# Altium PCB led_2835_driver_circle_34X34cm.PcbDoc (part 1 of 2)
Units mm, origin at the board's own origin, x right, y up, seen from the top; angles counter-clockwise.
Board outline 340 x 340 mm, 2 copper layers (Top Layer, Bottom Layer); 127 components, 122 nets, 254 pads, 0 vias.
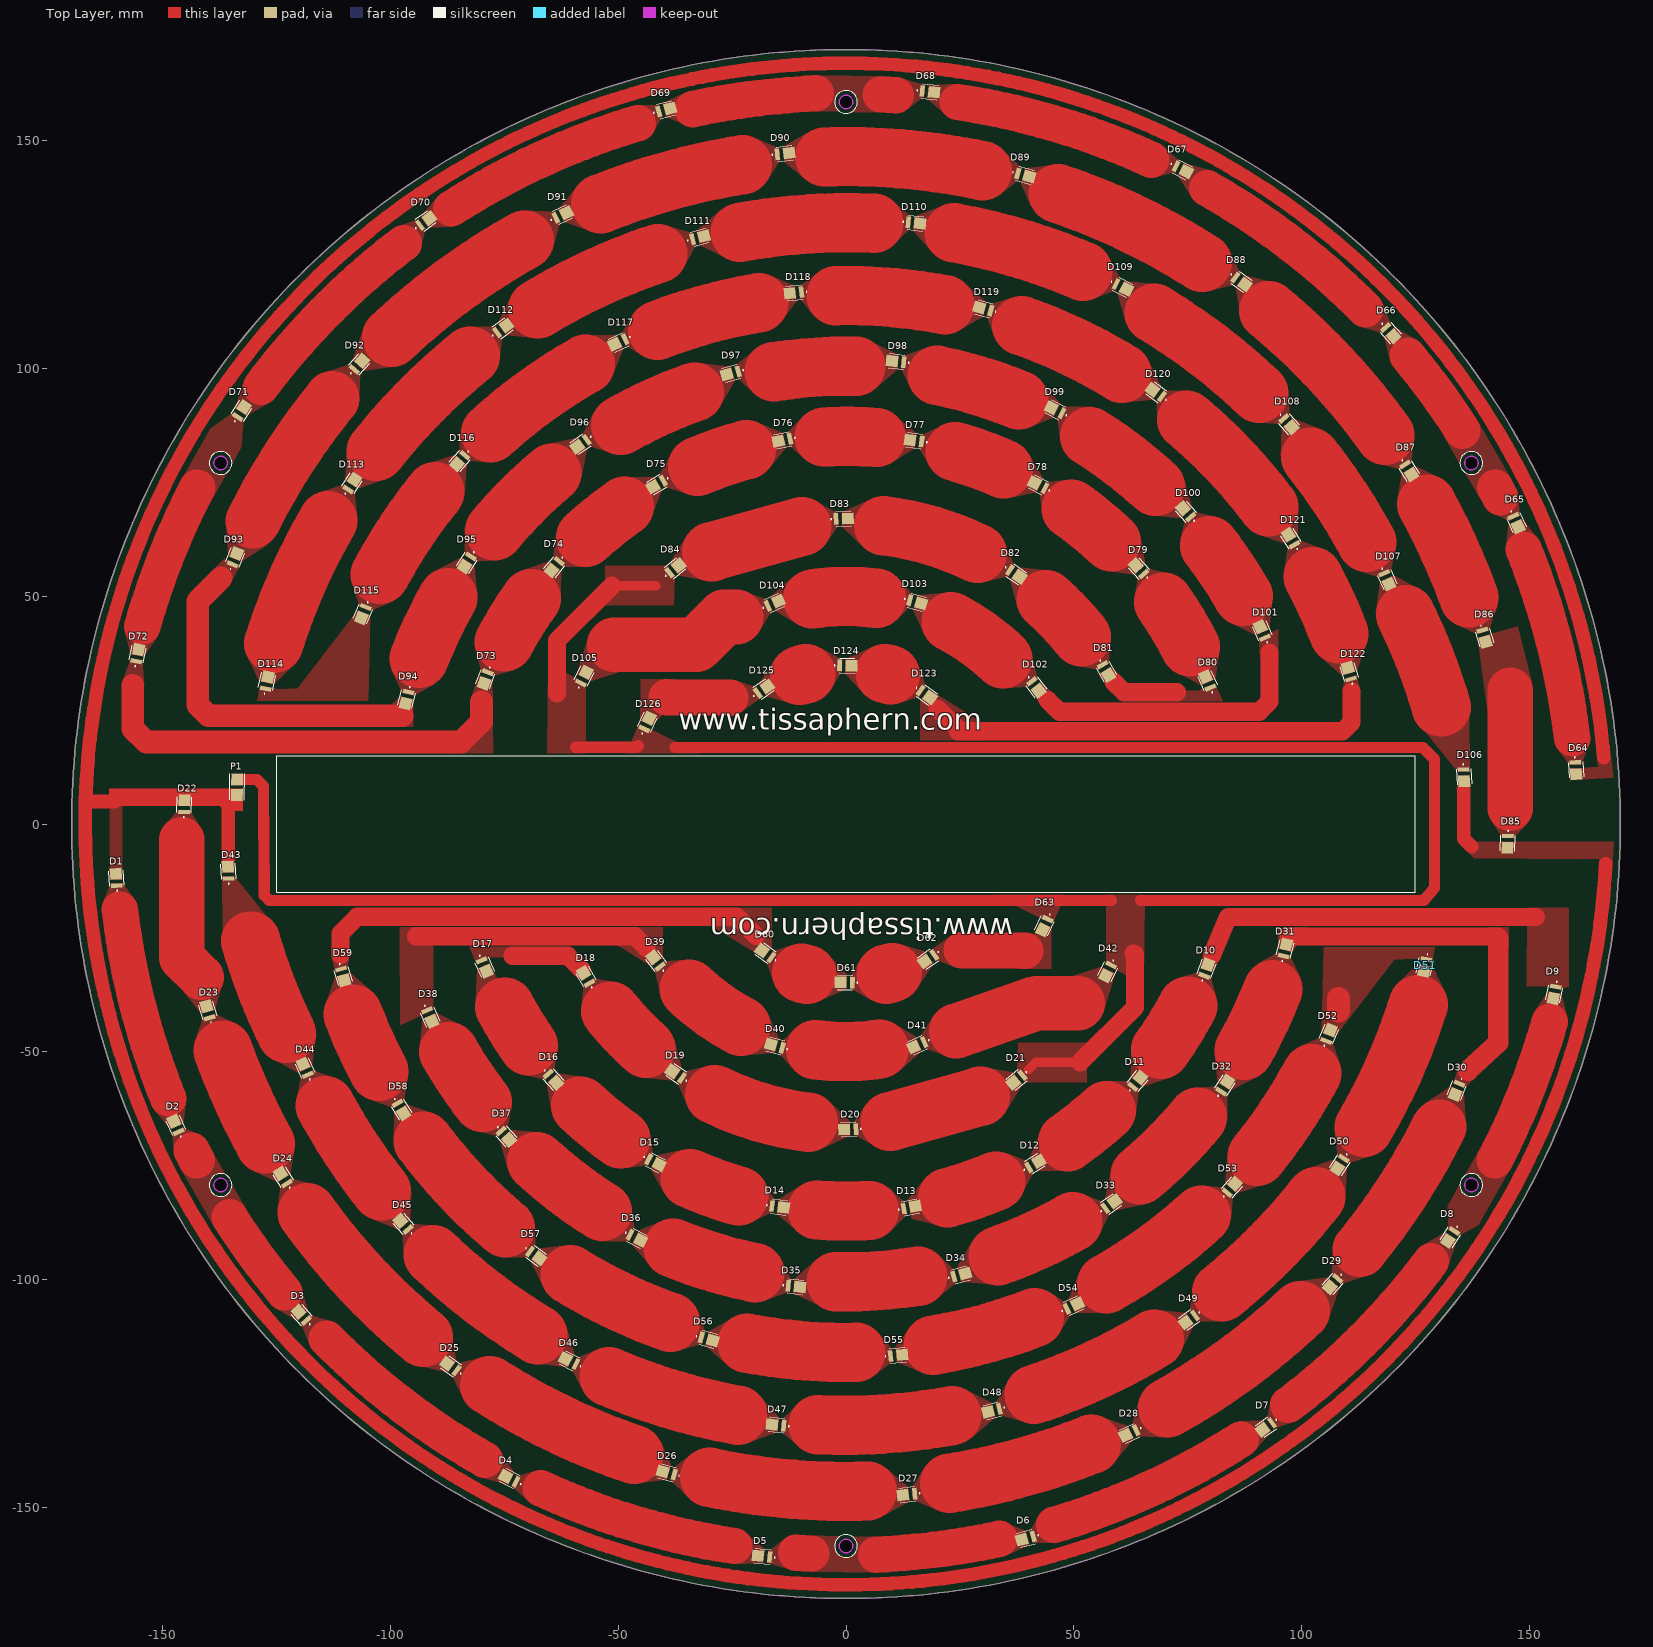
[diagram p0: Top Layer view]
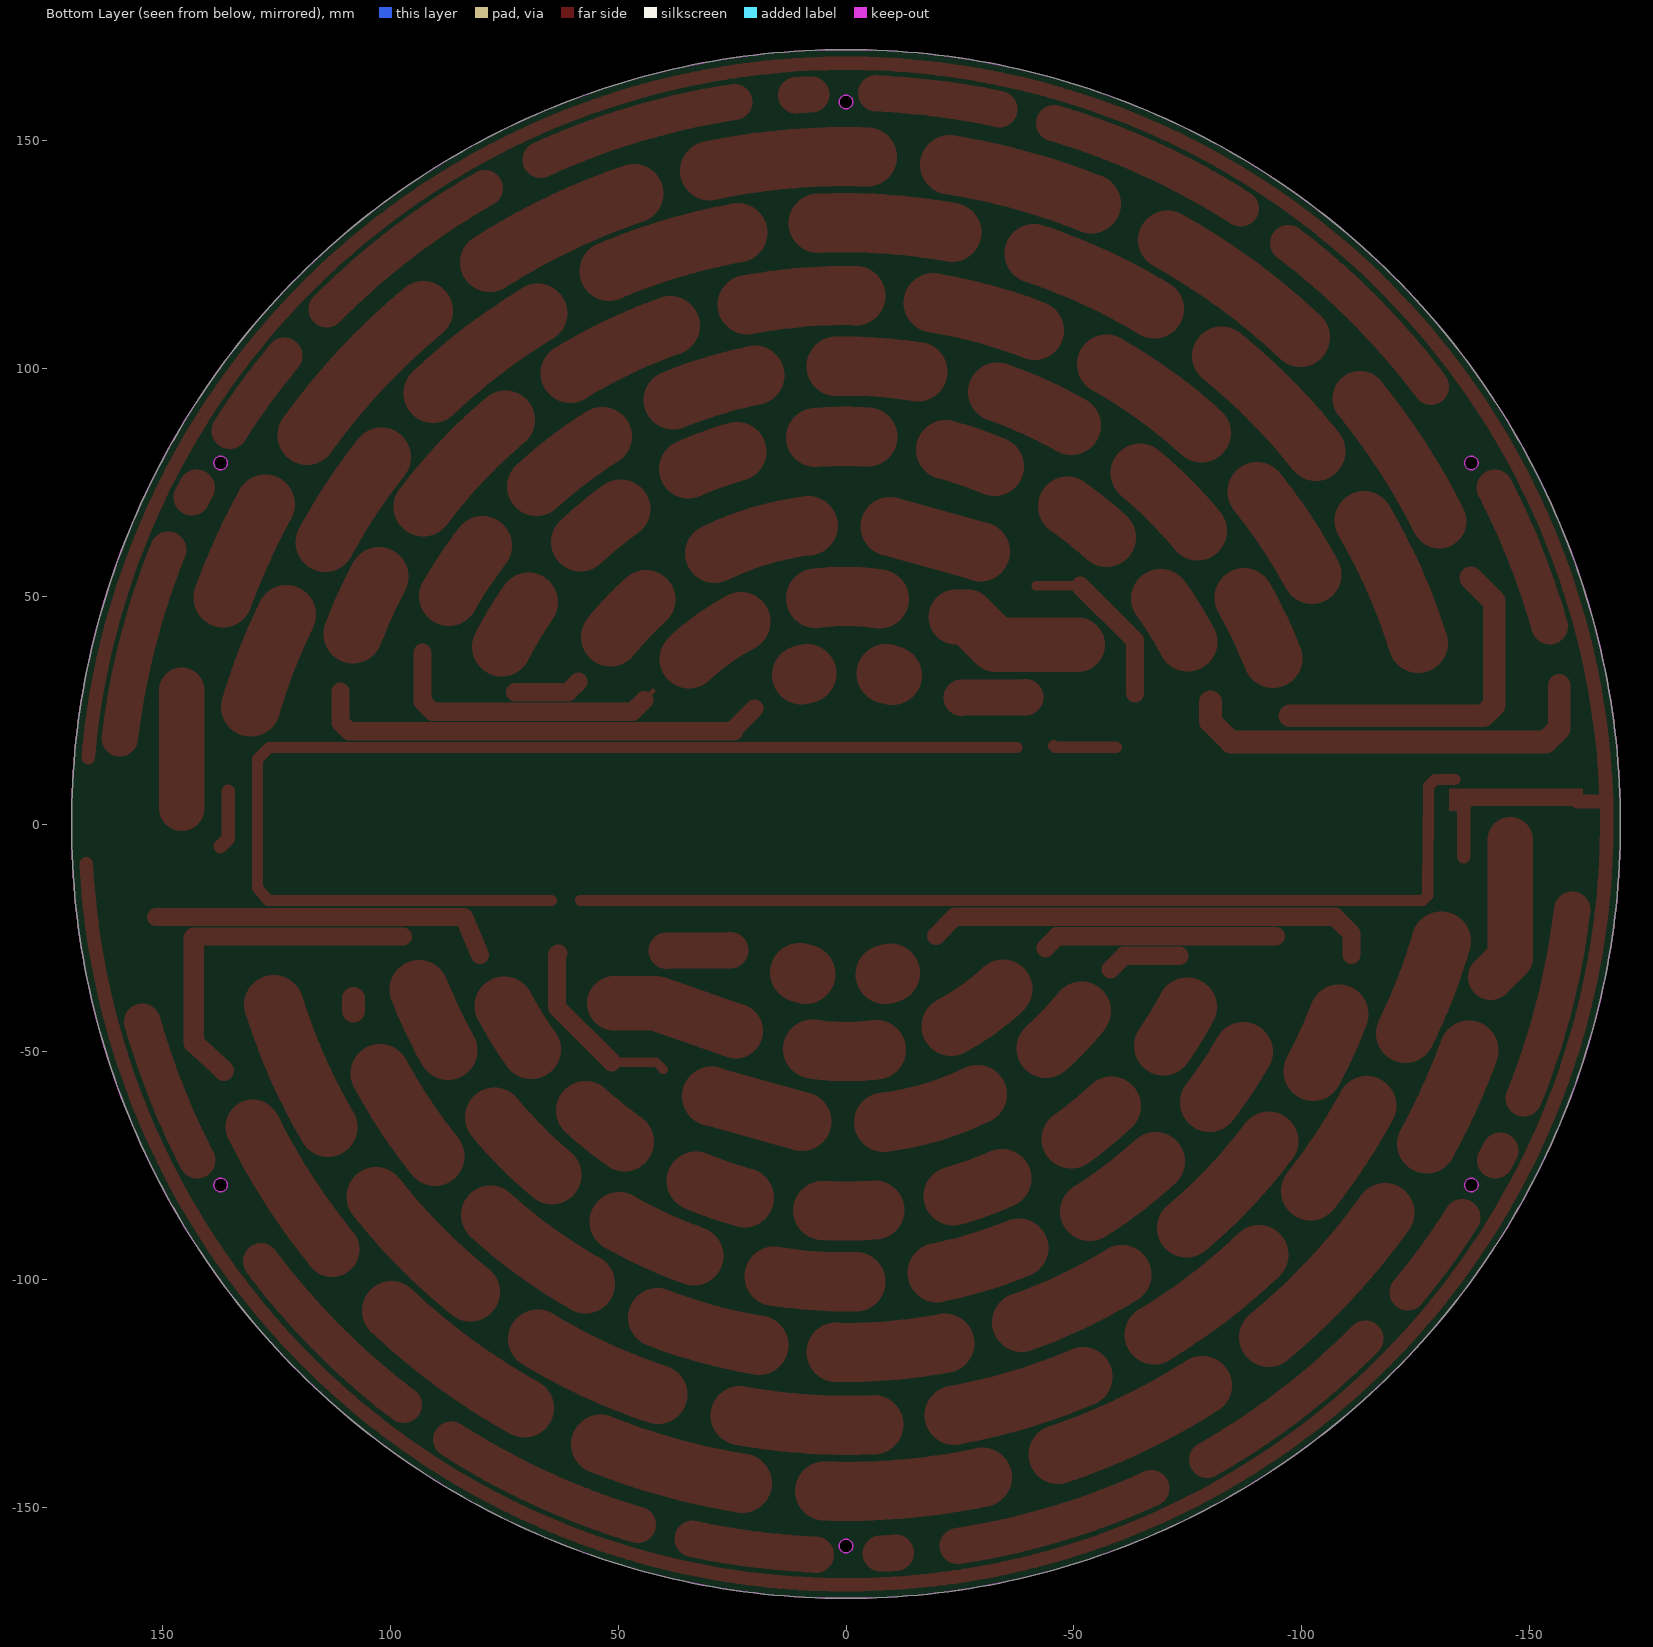
[diagram p1: Bottom Layer view, seen from below]

## Layer stack, top to bottom
Top Solder: solder mask 0.0102, Solder Resist, Dk 3.5
Top Layer: signal copper 0.0356
Dielectric 1: dielectric 0.32, FR-4, Dk 4.8
Bottom Layer: signal copper 0.0356
Bottom Solder: solder mask 0.0102, Solder Resist, Dk 3.5

## Board outline
0,-170 cw(c0,0) -170,0 cw(c0,0) 0,170 cw(c0,0) 170,0 cw(c0,0)
cut-out: 138.564,-80 cw(c137.265,-79.25) 136.515,-80.549 cw(c137.265,-79.25) 135.966,-78.5 cw(c137.265,-79.25) 138.015,-77.951 cw(c137.265,-79.25)
cut-out: -138.564,-80 cw(c-137.265,-79.25) -138.015,-77.951 cw(c-137.265,-79.25) -135.966,-78.5 cw(c-137.265,-79.25) -136.515,-80.549 cw(c-137.265,-79.25)
cut-out: 0,-160 cw(c0,-158.5) -1.5,-158.5 cw(c0,-158.5) 0,-157 cw(c0,-158.5) 1.5,-158.5 cw(c0,-158.5)
cut-out: 137.265,77.75 cw(c137.265,79.25) 135.765,79.25 cw(c137.265,79.25) 137.265,80.75 cw(c137.265,79.25) 138.765,79.25 cw(c137.265,79.25)
cut-out: -135.966,78.5 cw(c-137.265,79.25) -138.015,77.951 cw(c-137.265,79.25) -138.564,80 cw(c-137.265,79.25) -136.515,80.549 cw(c-137.265,79.25)
cut-out: 0,157 cw(c0,158.5) -1.5,158.5 cw(c0,158.5) 0,160 cw(c0,158.5) 1.5,158.5 cw(c0,158.5)

## Design rules (kind name [scope] priority, off if disabled: settings)
Clearance [All] p1: gap=0.254 ignorepadtopadclearanceinfootprint=FALSE except(0: Arc-Hole Track-Hole SMDPad-Hole THPad-Hole Via-Hole Fill-Hole Poly-Hole Region-Hole Text-Hole)
PolygonConnect PolygonConnect_4 [All vs IsNamedPolygon('NONET_L-01_P-001')] p1: connectstyle=Direct reliefconductorwidth=0.254 reliefentries=4 polygonreliefangle="90 Angle" airgapwidth=0.254
PolygonConnect PolygonConnect_3 [All vs IsNamedPolygon('NONET_L-01_P-001')] p2: connectstyle=Relief reliefconductorwidth=2 reliefentries=2 polygonreliefangle="90 Angle" airgapwidth=0.2
PolygonConnect PolygonConnect_2 [All vs IsNamedPolygon('NONET_L-01_P-001')] p3: connectstyle=Direct reliefconductorwidth=0.254 reliefentries=4 polygonreliefangle="90 Angle" airgapwidth=0.254
PolygonConnect PolygonConnect_1 [All vs IsNamedPolygon('NONET_L-01_P-001')] p4: connectstyle=Relief reliefconductorwidth=2 reliefentries=2 polygonreliefangle="90 Angle" airgapwidth=0.2
PolygonConnect [All] p5: connectstyle=Relief reliefconductorwidth=0.254 reliefentries=4 polygonreliefangle="90 Angle" airgapwidth=0.254
RoutingVias [All] p1: holewidth=0.711 width=1.27 viastyle="Through Hole" minholewidth=0.711 minwidth=1.27 maxholewidth=0.711 maxwidth=1.27
SolderMaskExpansion [All] p1: expansion=0.102 istentingtop=FALSE
Width [All] p1: maxlimit=20 minlimit=0.254 preferedwidth=0.254
30 further rules are at their usual default settings.

## Classes and differential pairs
component class led_2835_driver_circle_34X34cm: D22 D64 D65 D66 D67 D68 D69 D70 D71 D72 D73 D74 D75 D76 D77 D78 D79 D80 D81 D82 D83 D84 D86 D87 D88 D89 D90 D91 D92 D93 D94 D95 D96 D97 D98 D99 D100 D101 D102 D103 D104 D105 D106 D107 D108 D109 D110 D111 D112 D113 D114 D115 D116 D117 D118 D119 D120 D121 D122 D123 D124 D125 D126 P1

## Components (designator, comment, footprint, x,y, rotation, side; value= is the part's Value field where it differs from the comment)
D1 "OF-SMD2835Y" LED_OF-SMD2835Y -160.175,-12.225 r94 top
D2 "OF-SMD2835Y" LED_OF-SMD2835Y -147.025,-66.4 r114 top
D3 "OF-SMD2835Y" LED_OF-SMD2835Y -119.325,-108.025 r132 top
D4 "OF-SMD2835Y" LED_OF-SMD2835Y -73.575,-143.8 r153 top
D5 "OF-SMD2835Y" LED_OF-SMD2835Y -18.05,-160.775 r174 top
D6 "OF-SMD2835Y" LED_OF-SMD2835Y 39.85,-156.75 r195 top
D7 "OF-SMD2835Y" LED_OF-SMD2835Y 92.475,-132.2 r216 top
D8 "OF-SMD2835Y" LED_OF-SMD2835Y 132.825,-90.45 r237 top
D9 "OF-SMD2835Y" LED_OF-SMD2835Y 155.525,-37 r258 top
D10 "OF-SMD2835Y" LED_OF-SMD2835Y 79.05,-32.1 r70 top
D11 "OF-SMD2835Y" LED_OF-SMD2835Y 63.8,-56.65 r50.5 top
D12 "OF-SMD2835Y" LED_OF-SMD2835Y 41.225,-74.7 r31 top
D13 "OF-SMD2835Y" LED_OF-SMD2835Y 13.925,-84.175 r11.5 top
D14 "OF-SMD2835Y" LED_OF-SMD2835Y -14.975,-84 r352 top
D15 "OF-SMD2835Y" LED_OF-SMD2835Y -42.15,-74.175 r332.5 top
D16 "OF-SMD2835Y" LED_OF-SMD2835Y -64.5,-55.85 r313 top
D17 "OF-SMD2835Y" LED_OF-SMD2835Y -79.45,-31.125 r293.5 top
D18 "OF-SMD2835Y" LED_OF-SMD2835Y -56.975,-33.8 r120 top
D19 "OF-SMD2835Y" LED_OF-SMD2835Y -37.05,-55 r146 top
D20 "OF-SMD2835Y" LED_OF-SMD2835Y 0.875,-67 r182 top
D21 "OF-SMD2835Y" LED_OF-SMD2835Y 37.725,-55.975 r219 top
D22 "OF-SMD2835Y" LED_OF-SMD2835Y -145.25,3.9 r88 top
D23 "OF-SMD2835Y" LED_OF-SMD2835Y -140.05,-41.25 r106 top
D24 "OF-SMD2835Y" LED_OF-SMD2835Y -123.4,-77.8 r121.91 top
D25 "OF-SMD2835Y" LED_OF-SMD2835Y -86.525,-119.225 r144 top
D26 "OF-SMD2835Y" LED_OF-SMD2835Y -38.975,-142.475 r165 top
D27 "OF-SMD2835Y" LED_OF-SMD2835Y 13.775,-147.15 r186 top
D28 "OF-SMD2835Y" LED_OF-SMD2835Y 62.525,-133.65 r206 top
D29 "OF-SMD2835Y" LED_OF-SMD2835Y 107.075,-100.725 r228 top
D30 "OF-SMD2835Y" LED_OF-SMD2835Y 134.2,-58.2 r248 top
D31 "OF-SMD2835Y" LED_OF-SMD2835Y 96.35,-27.725 r75.96 top
D32 "OF-SMD2835Y" LED_OF-SMD2835Y 83.025,-57.625 r57 top
D33 "OF-SMD2835Y" LED_OF-SMD2835Y 57.95,-83.575 r36 top
D34 "OF-SMD2835Y" LED_OF-SMD2835Y 24.9,-99 r15 top
D35 "OF-SMD2835Y" LED_OF-SMD2835Y -11.4,-101.5 r354 top
D36 "OF-SMD2835Y" LED_OF-SMD2835Y -46.25,-90.775 r333 top
D37 "OF-SMD2835Y" LED_OF-SMD2835Y -74.825,-68.325 r312 top
D38 "OF-SMD2835Y" LED_OF-SMD2835Y -91.45,-42.1 r294 top
D39 "OF-SMD2835Y" LED_OF-SMD2835Y -41.55,-30.275 r127 top
D40 "OF-SMD2835Y" LED_OF-SMD2835Y -15.225,-48.775 r164 top
D41 "OF-SMD2835Y" LED_OF-SMD2835Y 16,-48.425 r204 top
D42 "OF-SMD2835Y" LED_OF-SMD2835Y 57.625,-32.125 r244 top
D43 "OF-SMD2835Y" LED_OF-SMD2835Y -135.625,-10.7 r93 top
D44 "OF-SMD2835Y" LED_OF-SMD2835Y -118.65,-53.875 r114 top
D45 "OF-SMD2835Y" LED_OF-SMD2835Y -96.975,-88.025 r132 top
D46 "OF-SMD2835Y" LED_OF-SMD2835Y -60.425,-117.95 r153 top
D47 "OF-SMD2835Y" LED_OF-SMD2835Y -14.95,-131.95 r174 top
D48 "OF-SMD2835Y" LED_OF-SMD2835Y 32.425,-128.7 r195 top
D49 "OF-SMD2835Y" LED_OF-SMD2835Y 75.575,-108.65 r216 top
D50 "OF-SMD2835Y" LED_OF-SMD2835Y 108.575,-74.55 r237 top
D51 "OF-SMD2835Y" LED_OF-SMD2835Y 127.15,-30.975 r258 top
D52 "OF-SMD2835Y" LED_OF-SMD2835Y 105.9,-46.425 r68 top
D53 "OF-SMD2835Y" LED_OF-SMD2835Y 84.525,-79.975 r48 top
D54 "OF-SMD2835Y" LED_OF-SMD2835Y 49.65,-105.85 r26 top
D55 "OF-SMD2835Y" LED_OF-SMD2835Y 11.05,-116.625 r6 top
D56 "OF-SMD2835Y" LED_OF-SMD2835Y -30.5,-113.025 r345 top
D57 "OF-SMD2835Y" LED_OF-SMD2835Y -68.3,-94.575 r324 top
D58 "OF-SMD2835Y" LED_OF-SMD2835Y -97.775,-62.4 r302 top
D59 "OF-SMD2835Y" LED_OF-SMD2835Y -110.5,-33.075 r286 top
D60 "OF-SMD2835Y" LED_OF-SMD2835Y -17.425,-28.525 r144 top
D61 "OF-SMD2835Y" LED_OF-SMD2835Y 0.1,-34.775 r179 top
D62 "OF-SMD2835Y" LED_OF-SMD2835Y 18.325,-29.475 r215 top
D63 "OF-SMD2835Y" LED_OF-SMD2835Y 43.725,-22.05 r245 top
D64 "OF-SMD2835Y" LED_OF-SMD2835Y 160.175,12.225 r274 top
D65 "OF-SMD2835Y" LED_OF-SMD2835Y 147.025,66.4 r294 top
D66 "OF-SMD2835Y" LED_OF-SMD2835Y 119.325,108.025 r312 top
D67 "OF-SMD2835Y" LED_OF-SMD2835Y 73.575,143.8 r333 top
D68 "OF-SMD2835Y" LED_OF-SMD2835Y 18.05,160.775 r354 top
D69 "OF-SMD2835Y" LED_OF-SMD2835Y -39.85,156.75 r15 top
D70 "OF-SMD2835Y" LED_OF-SMD2835Y -92.475,132.2 r36 top
D71 "OF-SMD2835Y" LED_OF-SMD2835Y -132.825,90.45 r57 top
D72 "OF-SMD2835Y" LED_OF-SMD2835Y -155.525,37 r78 top
D73 "OF-SMD2835Y" LED_OF-SMD2835Y -79.05,32.1 r250 top
D74 "OF-SMD2835Y" LED_OF-SMD2835Y -63.8,56.65 r230.5 top
D75 "OF-SMD2835Y" LED_OF-SMD2835Y -41.235,74.69 r210.5 top
D76 "OF-SMD2835Y" LED_OF-SMD2835Y -13.565,84.299 r191.5 top
D77 "OF-SMD2835Y" LED_OF-SMD2835Y 15.335,84.124 r172 top
D78 "OF-SMD2835Y" LED_OF-SMD2835Y 42.51,74.299 r152.5 top
D79 "OF-SMD2835Y" LED_OF-SMD2835Y 64.5,55.85 r133 top
D80 "OF-SMD2835Y" LED_OF-SMD2835Y 79.45,31.125 r113.5 top
D81 "OF-SMD2835Y" LED_OF-SMD2835Y 56.975,33.8 r300 top
D82 "OF-SMD2835Y" LED_OF-SMD2835Y 37.05,55 r326 top
D83 "OF-SMD2835Y" LED_OF-SMD2835Y -0.875,67 r2 top
D84 "OF-SMD2835Y" LED_OF-SMD2835Y -37.725,55.975 r39 top
D85 "OF-SMD2835Y" LED_OF-SMD2835Y 145.25,-3.9 r268 top
D86 "OF-SMD2835Y" LED_OF-SMD2835Y 140.05,41.25 r286 top
D87 "OF-SMD2835Y" LED_OF-SMD2835Y 123.4,77.8 r301.91 top
D88 "OF-SMD2835Y" LED_OF-SMD2835Y 86.525,119.225 r324 top
D89 "OF-SMD2835Y" LED_OF-SMD2835Y 38.975,142.475 r345 top
D90 "OF-SMD2835Y" LED_OF-SMD2835Y -13.775,147.15 r6 top
D91 "OF-SMD2835Y" LED_OF-SMD2835Y -62.525,133.65 r26 top
D92 "OF-SMD2835Y" LED_OF-SMD2835Y -107.075,100.725 r48 top
D93 "OF-SMD2835Y" LED_OF-SMD2835Y -134.2,58.2 r68 top
D94 "OF-SMD2835Y" LED_OF-SMD2835Y -96.35,27.725 r255.96 top
D95 "OF-SMD2835Y" LED_OF-SMD2835Y -83.025,57.625 r237 top
D96 "OF-SMD2835Y" LED_OF-SMD2835Y -57.95,83.575 r216 top
D97 "OF-SMD2835Y" LED_OF-SMD2835Y -24.9,99 r195 top
D98 "OF-SMD2835Y" LED_OF-SMD2835Y 11.4,101.5 r174 top
D99 "OF-SMD2835Y" LED_OF-SMD2835Y 46.25,90.775 r153 top
D100 "OF-SMD2835Y" LED_OF-SMD2835Y 74.825,68.325 r132 top
D101 "OF-SMD2835Y" LED_OF-SMD2835Y 91.45,42.1 r114 top
D102 "OF-SMD2835Y" LED_OF-SMD2835Y 41.55,30.275 r307 top
D103 "OF-SMD2835Y" LED_OF-SMD2835Y 15.225,48.775 r344 top
D104 "OF-SMD2835Y" LED_OF-SMD2835Y -16,48.425 r24 top
D105 "OF-SMD2835Y" LED_OF-SMD2835Y -57.625,32.125 r64 top
D106 "OF-SMD2835Y" LED_OF-SMD2835Y 135.625,10.7 r273 top
D107 "OF-SMD2835Y" LED_OF-SMD2835Y 118.65,53.875 r294 top
D108 "OF-SMD2835Y" LED_OF-SMD2835Y 96.975,88.025 r312 top
D109 "OF-SMD2835Y" LED_OF-SMD2835Y 60.425,117.95 r333 top
D110 "OF-SMD2835Y" LED_OF-SMD2835Y 14.95,131.95 r354 top
D111 "OF-SMD2835Y" LED_OF-SMD2835Y -32.425,128.7 r15 top
D112 "OF-SMD2835Y" LED_OF-SMD2835Y -75.575,108.65 r36 top
D113 "OF-SMD2835Y" LED_OF-SMD2835Y -108.575,74.55 r57 top
D114 "OF-SMD2835Y" LED_OF-SMD2835Y -127.15,30.975 r78 top
D115 "OF-SMD2835Y" LED_OF-SMD2835Y -105.9,46.425 r248 top
D116 "OF-SMD2835Y" LED_OF-SMD2835Y -84.525,79.975 r228 top
D117 "OF-SMD2835Y" LED_OF-SMD2835Y -49.65,105.85 r206 top
D118 "OF-SMD2835Y" LED_OF-SMD2835Y -11.05,116.625 r186 top
D119 "OF-SMD2835Y" LED_OF-SMD2835Y 30.5,113.025 r165 top
D120 "OF-SMD2835Y" LED_OF-SMD2835Y 68.3,94.575 r144 top
D121 "OF-SMD2835Y" LED_OF-SMD2835Y 97.775,62.4 r122 top
D122 "OF-SMD2835Y" LED_OF-SMD2835Y 110.5,33.075 r106 top
D123 "OF-SMD2835Y" LED_OF-SMD2835Y 17.425,28.525 r324 top
D124 "OF-SMD2835Y" LED_OF-SMD2835Y -0.1,34.775 r359 top
D125 "OF-SMD2835Y" LED_OF-SMD2835Y -18.325,29.475 r35 top
D126 "OF-SMD2835Y" LED_OF-SMD2835Y -43.725,22.05 r65 top
P1 "Header 2" HDR1X2_SMD -133.68,8.075 r89 top

## Footprints (in the part's own frame and the unit in brackets; to place one, negate y for a bottom-side part, rotate by r counter-clockwise, add the part's x,y. Pads: shape width x height; smd on the part's side, far side on the other; paste and mask are expansions set on the pad)
HDR1X2_SMD [mm] "Connector; Header; 2 Position"
  rect 2.6x2.55 smd: GND(1.7,0) VCC(-1.7,0)
  silkscreen extent -2.85,-1.6 2.95,1.6
LED_OF-SMD2835Y [mm]
  rect 2.6x2.55 smd: A(1.3,0)
  rect 1x2.55 smd: C(-1.3,0)
  silkscreen extent -2.5,-1.6 2,1.6

## Part data
D1 D2 D3 D4 D5 D6 D7 D8 D9 D10 D11 D12 D13 D14 D15 D16 D17 D18 D19 D20 D21 D22 D23 D24 D25 D26 D27 D28 D29 D30 D31 D32 D33 D34 D35 D36 D37 D38 D39 D40 D41 D42 D43 D44 D45 D46 D47 D48 D49 D50 D51 D52 D53 D54 D55 D56 D57 D58 D59 D60 D61 D62 D63 D64 D65 D66 D67 D68 D69 D70 D71 D72 D73 D74 D75 D76 D77 D78 D79 D80 D81 D82 D83 D84 D85 D86 D87 D88 D89 D90 D91 D92 D93 D94 D95 D96 D97 D98 D99 D100 D101 D102 D103 D104 D105 D106 D107 D108 D109 D110 D111 D112 D113 D114 D115 D116 D117 D118 D119 D120 D121 D122 D123 D124 D125 D126: "LED; SMD; 2835, PLCC2; yellow; 2200-2800mcd; 2.8x3.5x0.75mm; 120Â°", Package=None, Availability=Unavailable, MP=OF-SMD2835Y, Price=None
P1: "Header, 2-Pin", LatestRevisionDate=17-Jul-2002, LatestRevisionNote="Re-released for DXP Platform.", Publisher="Altium Limited"

## Nets (pads, with @x,y where several pads share a name; then routed paths per layer and width w, separated by ;. In a path a pad name is that pad's centre, name@x,y a point inside that pad or via, vN(x,y) a via of type N, cw(c..) or ccw(c..) an arc to the next point about the centre after c; other vN are vias at no path point)
GND: D21.C D42.C D63.C D84.C D105.C D126.C P1.GND | length 571.7
  Top Layer w2: -51.4,52.3 -41.675,52.3 ; 40.125,-53.85 41.675,-52.3 51.4,-52.3
  Top Layer w2.5: P1.GND@-133.65,9.775 -129.362,9.775 -127.898,8.31 -127.874,7.298 -127.669,-14.446 -127.669,-15.696 -126.567,-16.798 58.253,-16.798 ; -59.36,16.805 -45.91,16.805 -45.578,17.137 ; -37.531,16.799 126.581,16.799 129.173,14.207 129.173,-14.033 128.57,-14.735 126.798,-16.8 64.674,-16.8
  Top Layer w4: -63.438,28.663 -63.438,40.262 -51.4,52.3 ; 51.4,-52.3 63.438,-40.262 63.438,-28.663 63.175,-28.4
NetD1_C: D1.C D2.A | length 42.9
  Top Layer w8: -159.397,-18.785 ccw(c0,0) -148.78,-60.207
NetD2_C: D2.C D3.A | length 22.7
  Top Layer w8: -143.581,-71.728 ccw(c0,0) -142.523,-73.807 ; -135.279,-86.37 ccw(c0,0) -123.263,-102.794
NetD3_C: D3.C D4.A | length 43.8
  Top Layer w8: -113.952,-113.027 ccw(c0,0) -79.301,-139.541
NetD4_C: D4.C D5.A | length 44.5
  Top Layer w8: -66.978,-145.84 ccw(c-0.4,0.2) -24.483,-158.483
NetD5_C: D5.C D6.A | length 30.6
  Top Layer w8: -10.945,-159.953 ccw(c-0.4,0.2) -7.598,-160.138 ; 6.658,-160.362 ccw(c0,0) 33.652,-156.933
NetD6_C: D6.C D7.A | length 45.2
  Top Layer w8: 45.682,-153.862 ccw(c0,0) 86.636,-135.109
NetD7_C: D7.C D8.A | length 44.6
  Top Layer w8: 97.098,-127.529 ccw(c0,0.268) 128.412,-96.015
NetD8_C: D8.C D9.A | length 32.8
  Top Layer w8: 142.375,-73.824 ccw(c0,0.268) 154.446,-43.398
NetD9_C: D9.C D10.A | length 76.6
  Top Layer w4: 80.355,-28.764 83.854,-20.398 151.432,-20.398
NetD10_C: D10.C D11.A | length 11.3
  Top Layer w13: 69.083,-49.523 ccw(c0,0) 75.042,-39.922
NetD11_C: D11.C D12.A | length 11
  Top Layer w13: 48.598,-69.737 ccw(c0,0) 57.176,-62.896
NetD12_C: D12.C D13.A | length 11.3
  Top Layer w13: 22.274,-82.03 ccw(c0,0) 32.931,-78.362
NetD13_C: D13.C D14.A | length 11.5
  Top Layer w13: -6.322,-84.74 ccw(c-0.007,0.026) 5.139,-84.819
NetD14_C: D14.C D15.A | length 11.4
  Top Layer w13: -34.243,-77.797 ccw(c0,0) -23.549,-81.673
NetD15_C: D15.C D16.A | length 11.5
  Top Layer w13: -58.282,-61.873 ccw(c0,0) -49.429,-69.15
NetD16_C: D16.C D17.A | length 10
  Top Layer w13: -74.921,-40.147 ccw(c0,0) -69.699,-48.652
NetD17_C: D17.C D18.A | length 16.4
  Top Layer w4: -73.23,-28.938 -61.037,-28.938 D18.A@-58.061,-31.913
NetD18_C: D18.C D19.A | length 11.3
  Top Layer w13: -51.668,-41.067 ccw(c0,0) -43.923,-49.262
NetD19_C: D19.C D20.A | length 21.6
  Top Layer w13: -28.844,-59.364 ccw(c0,0) -8.263,-65.481
NetD20_C: D20.C D21.A | length 20.5
  Top Layer w13: 9.731,-65.279 29.424,-59.775 ccw(c25.857,-47.01) 29.516,-59.749
NetD22_C: D22.C D23.A | length 31.9
  Top Layer w10: -145.834,-3.493 -145.834,-29.329 -141.569,-33.594
NetD23_C: D23.C D24.A | length 22.6
  Top Layer w13: -136.763,-49.66 ccw(c0,0) -127.456,-70.18
NetD24_C: D24.C D25.A | length 37.5
  Top Layer w13: -118.318,-85.322 ccw(c-0.1,-0.5) -92.782,-112.662
NetD25_C: D25.C D26.A | length 35.2
  Top Layer w13: -78.181,-123.274 ccw(c-0.1,-0.5) -46.513,-138.399
NetD26_C: D26.C D27.A | length 34.9
  Top Layer w13: -29.919,-143.414 ccw(c-0.094,-1.004) 4.748,-146.423
NetD27_C: D27.C D28.A | length 32.3
  Top Layer w13: 22.783,-144.694 ccw(c-0.094,-1.004) 53.828,-136.143
NetD28_C: D28.C D29.A | length 36.3
  Top Layer w13: 70.566,-128.194 ccw(c-0.094,-1.004) 99.763,-106.828
NetD29_C: D29.C D30.A | length 32.1
  Top Layer w12: 112.81,-93.398 ccw(c0,-1.505) 130.2,-66.453
NetD30_C: D30.C D31.A | length 77.8
  Top Layer w4: 97.284,-24.7 143.2,-24.7
  Top Layer w4.5: 136.575,-54.125 143.2,-47.969 143.2,-25.107
NetD31_C: D31.C D32.A | length 14.8
  Top Layer w13: 87.36,-49.684 ccw(c0,0) 93.71,-36.315
NetD32_C: D32.C D33.A | length 17.9
  Top Layer w13: 64.55,-77.03 ccw(c0,0) 77.178,-64.373
NetD33_C: D33.C D34.A | length 18.1
  Top Layer w13: 33.36,-94.802 ccw(c0,0) 49.759,-87.317
NetD34_C: D34.C D35.A | length 18.1
  Top Layer w13: -2.217,-100.476 ccw(c0,0) 15.787,-99.252
NetD35_C: D35.C D36.A | length 18.7
  Top Layer w13: -37.915,-93.074 ccw(c0,0) -20.025,-98.485
NetD36_C: D36.C D37.A | length 18.2
  Top Layer w13: -67.914,-74.081 ccw(c0,0) -53.49,-85.082
NetD37_C: D37.C D38.A | length 13.3
  Top Layer w13: -87.192,-49.978 ccw(c0,0) -79.816,-61.071
NetD38_C: D38.C D39.A | length 51.6
  Top Layer w4: -94.315,-24.64 -46.344,-24.64 ; -46.344,-24.706 -43.8,-27.25
NetD39_C: D39.C D40.A | length 14.1
  Top Layer w13: -34.465,-36.223 ccw(c0,0) -23.023,-44.384
NetD40_C: D40.C D41.A | length 14.1
  Top Layer w13: -6.684,-49.534 ccw(c-0.092,0.029) 7.37,-49.411
NetD41_C: D41.C D42.A | length 27.7
  Top Layer w12: 24.222,-45.437 cw(c28.154,-56.774) 24.229,-45.434 41.887,-39.311 43.937,-39.311 50.851,-39.343
NetD43_C: D43.C D44.A | length 21.8
  Top Layer w13: -130.673,-25.707 ccw(c-5.961,10.995) -122.796,-46.01
NetD44_C: D44.C D45.A | length 22.5
  Top Layer w13: -114.327,-61.826 ccw(c-0.079,0.201) -101.951,-80.558
NetD45_C: D45.C D46.A | length 29
  Top Layer w13: -90.648,-94.542 ccw(c-0.14,0.164) -67.657,-112.096
NetD46_C: D46.C D47.A | length 29.5
  Top Layer w13: -52.001,-121.32 ccw(c-0.593,-0.828) -23.764,-129.763
NetD47_C: D47.C D48.A | length 29.5
  Top Layer w13: -6.078,-131.857 ccw(c-0.257,-0.986) 23.26,-129.858
NetD48_C: D48.C D49.A | length 29.1
  Top Layer w13: 41.277,-125.232 ccw(c-0.026,-0.914) 67.684,-113.058
NetD49_C: D49.C D50.A | length 29.4
  Top Layer w13: 82.477,-102.706 ccw(c0.303,-0.684) 103.144,-81.831
NetD50_C: D50.C D51.A | length 29.5
  Top Layer w13: 113.705,-66.586 ccw(c0.58,-0.528) 125.591,-39.686
NetD51_C: D51.C D52.A | length 2.8
  Top Layer w5: 108.1,-41.076 108.1,-38.325
NetD52_C: D52.C D53.A | length 21.8
  Top Layer w13: 90.205,-72.932 ccw(c0,0) 102.265,-54.752
NetD53_C: D53.C D54.A | length 25.8
  Top Layer w13: 57.188,-100.923 ccw(c0,0) 78.052,-85.813
NetD54_C: D54.C D55.A | length 23.1
  Top Layer w13: 19.158,-114.407 ccw(c0,0) 41.406,-108.359
NetD55_C: D55.C D56.A | length 24
  Top Layer w13: -21.671,-113.958 ccw(c0,0) 2.17,-115.98
NetD56_C: D56.C D57.A | length 24.3
  Top Layer w13: -60.538,-98.95 ccw(c0,0) -38.591,-109.392
NetD57_C: D57.C D58.A | length 26.3
  Top Layer w13: -92.788,-69.616 ccw(c0,0) -74.769,-88.689
NetD58_C: D58.C D59.A | length 13.8
  Top Layer w13: -108.218,-41.772 ccw(c0,0) -102.513,-54.288
NetD59_C: D59.C D60.A | length 99.2
  Top Layer w4: -110.958,-28.725 -110.958,-24.008 -107.263,-20.313 ; -107.263,-20.344 -23.942,-20.344 -19.73,-24.556
NetD60_C: D60.C D61.A | length 1.2
  Top Layer w13: -9.746,-32.73 ccw(c0,0) -8.546,-33.063
NetD61_C: D61.C D62.A | length 1.4
  Top Layer w13: 8.826,-32.99 ccw(c0,0) 10.176,-32.599
NetD62_C: D62.C D63.A | length 13.9
  Top Layer w8: 25.453,-27.725 39.375,-27.825
NetD64_C: D64.C D65.A | length 42.9
  Top Layer w8: 148.78,60.207 cw(c0,0) 159.397,18.785
NetD65_C: D65.C D66.A | length 22.7
  Top Layer w8: 123.263,102.794 cw(c0,0) 135.279,86.37 ; 142.523,73.807 cw(c0,0) 143.581,71.728
NetD66_C: D66.C D67.A | length 43.8
  Top Layer w8: 79.301,139.541 cw(c0,0) 113.952,113.027
NetD67_C: D67.C D68.A | length 44.5
  Top Layer w8: 24.483,158.483 cw(c0.4,-0.2) 66.978,145.84
NetD68_C: D68.C D69.A | length 30.6
  Top Layer w8: -33.652,156.933 cw(c0,0) -6.658,160.362 ; 7.598,160.138 cw(c0.4,-0.2) 10.945,159.953
NetD69_C: D69.C D70.A | length 45.2
  Top Layer w8: -86.636,135.109 cw(c0,0) -45.682,153.862
NetD70_C: D70.C D71.A | length 44.6
  Top Layer w8: -128.412,96.015 cw(c0,-0.268) -97.098,127.529
NetD71_C: D71.C D72.A | length 32.8
  Top Layer w8: -154.446,43.398 cw(c0,-0.268) -142.375,73.824
NetD72_C: D72.C D73.A | length 93.4
  Top Layer w5: -156.55,30.425 -156.55,20.929 -153.621,18 -84.5,18 -80,22.5 -80,26.825
NetD73_C: D73.C D74.A | length 11.3
  Top Layer w13: -75.042,39.922 cw(c0,0) -69.083,49.523
NetD74_C: D74.C D75.A | length 11
  Top Layer w13: -57.176,62.896 cw(c0,0) -48.598,69.737
NetD75_C: D75.C D76.A | length 11.3
  Top Layer w13: -32.572,78.486 cw(c0.36,0.124) -21.914,82.154
NetD76_C: D76.C D77.A | length 11.5
  Top Layer w13: -4.779,84.943 cw(c0.367,0.099) 6.682,84.864
NetD77_C: D77.C D78.A | length 11.4
  Top Layer w13: 23.908,81.797 cw(c0.36,0.124) 34.603,77.921
NetD78_C: D78.C D79.A | length 11.5
  Top Layer w13: 49.429,69.15 cw(c0,0) 58.282,61.873
NetD79_C: D79.C D80.A | length 11.4
  Top Layer w13: 69.699,48.652 cw(c0,0) 75.571,38.91
NetD80_C: D80.C D81.A | length 14.8
  Top Layer w4: 58.748,31.227 61.037,28.938 72.617,28.938
NetD81_C: D81.C D82.A | length 11.3
  Top Layer w13: 43.923,49.262 cw(c0,0) 51.668,41.067
NetD82_C: D82.C D83.A | length 21.6
  Top Layer w13: 8.263,65.481 cw(c0,0) 28.844,59.364
NetD83_C: D83.C D84.A | length 20.5
  Top Layer w13: -29.516,59.749 cw(c-25.857,47.01) -29.424,59.775 -9.731,65.279
NetD85_C: D85.C D86.A | length 25.8
  Top Layer w10: 145.834,3.493 145.834,29.329
NetD86_C: D86.C D87.A | length 22.6
  Top Layer w13: 127.456,70.18 cw(c0,0) 136.763,49.66
NetD87_C: D87.C D88.A | length 37.5
  Top Layer w13: 92.782,112.662 cw(c0.1,0.5) 118.318,85.322
NetD88_C: D88.C D89.A | length 35.2
  Top Layer w13: 46.513,138.399 cw(c0.1,0.5) 78.181,123.274
NetD89_C: D89.C D90.A | length 34.9
  Top Layer w13: -4.748,146.423 cw(c0.094,1.004) 29.919,143.414
NetD90_C: D90.C D91.A | length 32.3
  Top Layer w13: -53.828,136.143 cw(c0.094,1.004) -22.783,144.694
NetD91_C: D91.C D92.A | length 36.3
  Top Layer w13: -99.763,106.828 cw(c0.094,1.004) -70.566,128.194
NetD92_C: D92.C D93.A | length 32.1
  Top Layer w12: -130.2,66.453 cw(c0,1.505) -112.81,93.398
NetD93_C: D93.C D94.A | length 75.8
  Top Layer w5: -137.122,54.047 -142.275,48.894 -142.275,26.118 -139.932,23.775 -97.475,23.775
NetD94_C: D94.C D95.A | length 14.8
  Top Layer w13: -93.71,36.315 cw(c0,0) -87.36,49.684
NetD95_C: D95.C D96.A | length 17.9
  Top Layer w13: -77.178,64.373 cw(c0,0) -64.55,77.03
NetD96_C: D96.C D97.A | length 17.8
  Top Layer w13: -49.466,87.484 cw(c0,0) -33.269,94.834
NetD97_C: D97.C D98.A | length 18.1
  Top Layer w13: -15.787,99.252 cw(c0,0) 2.217,100.476
NetD98_C: D98.C D99.A | length 18.7
  Top Layer w13: 20.025,98.485 cw(c0,0) 37.915,93.074
NetD99_C: D99.C D100.A | length 18.2
  Top Layer w13: 53.49,85.082 cw(c0,0) 67.914,74.081
NetD100_C: D100.C D101.A | length 13.3
  Top Layer w13: 79.816,61.071 cw(c0,0) 87.192,49.978
NetD101_C: D101.C D102.A | length 64.3
  Top Layer w1: D102.A@42.332,29.237 44.278,27.291 44.278,27.198
  Top Layer w4: 44.278,27.198 46.852,24.645 90.744,24.645 92.969,26.87 92.969,37.676
NetD102_C: D102.C D103.A | length 14.1
  Top Layer w13: 23.023,44.384 cw(c0,0) 34.465,36.223
NetD103_C: D103.C D104.A | length 14.1
  Top Layer w13: -7.37,49.411 cw(c0.092,-0.029) 6.684,49.534
NetD104_C: D104.C D105.A | length 29.3
  Top Layer w12: -50.851,39.343 -43.937,39.311 -32.864,39.311 -26.725,45.45 -24.075,45.45
NetD106_C: D106.C D107.A | length 21.8
  Top Layer w13: 122.796,46.01 cw(c5.961,-10.995) 130.673,25.707
NetD107_C: D107.C D108.A | length 22.5
  Top Layer w13: 101.951,80.558 cw(c0.079,-0.201) 114.327,61.826
NetD108_C: D108.C D109.A | length 29
  Top Layer w13: 67.657,112.096 cw(c0.14,-0.164) 90.648,94.542
NetD109_C: D109.C D110.A | length 29.5
  Top Layer w13: 23.764,129.763 cw(c0.593,0.828) 52.001,121.32
NetD110_C: D110.C D111.A | length 29.5
  Top Layer w13: -23.26,129.858 cw(c0.257,0.986) 6.078,131.857
NetD111_C: D111.C D112.A | length 29.1
  Top Layer w13: -67.684,113.058 cw(c0.026,0.914) -41.277,125.232
NetD112_C: D112.C D113.A | length 29.4
  Top Layer w13: -103.144,81.831 cw(c-0.303,0.684) -82.477,102.706
NetD113_C: D113.C D114.A | length 29.5
  Top Layer w13: -125.591,39.686 cw(c-0.58,0.528) -113.705,66.586
NetD114_C: D114.C D115.A
NetD115_C: D115.C D116.A | length 21.8
  Top Layer w13: -102.265,54.752 cw(c0,0) -90.205,72.932
NetD116_C: D116.C D117.A | length 25.8
  Top Layer w13: -78.052,85.813 cw(c0,0) -57.188,100.923
NetD117_C: D117.C D118.A | length 23.1
  Top Layer w13: -41.406,108.359 cw(c0,0) -19.158,114.407
NetD118_C: D118.C D119.A | length 24
  Top Layer w13: -2.17,115.98 cw(c0,0) 21.671,113.958
NetD119_C: D119.C D120.A | length 24.3
  Top Layer w13: 38.591,109.392 cw(c0,0) 60.538,98.95
NetD120_C: D120.C D121.A | length 26.3
  Top Layer w13: 74.769,88.689 cw(c0,0) 92.788,69.616
NetD121_C: D121.C D122.A | length 13.8
  Top Layer w13: 102.513,54.288 cw(c0,0) 108.218,41.772
NetD122_C: D122.C D123.A | length 100.3
  Top Layer w4: 20.075,25.375 20.645,24.805 24.556,20.894 ; 24.556,20.347 108.99,20.347 110.962,22.32 110.962,29.075
NetD123_C: D123.C D124.A | length 1.2
  Top Layer w13: 8.546,33.063 cw(c0,0) 9.746,32.73
NetD124_C: D124.C D125.A | length 1.4
  Top Layer w13: -10.176,32.599 cw(c0,0) -8.826,32.99
NetD125_C: D125.C D126.A | length 13.9
  Top Layer w8: -39.375,27.825 -25.453,27.725
VCC: D1.A D22.A D43.A D64.A D85.A D106.A P1.VCC | length 1082.3
  Top Layer w2: -160.2,6.5 -133.834,6.5 P1.VCC@-133.71,6.375
  Top Layer w3: -160.5,4.925 -166.922,4.925 -166.922,5.12 ; -135.575,-7.155 -135.575,3.168 ; 135.575,7.155 135.575,-3.168 137.332,-4.925 ; 166.365,14.555 ccw(c0,0) -166.922,5.12 ; 166.771,-8.74 cw(c0,0) -166.922,5.12

## Polygon pours and split planes (outlines as drawn)
NetD16_C on Top Layer "NONET_L-01_P-001" (solid, remove dead copper, pour order 156): -80.951,-31.774 -81.38,-40.851 -75.618,-35.928 -78.278,-30.617
NetD32_C on Top Layer "NONET_L-01_P-001" (solid, remove dead copper, pour order 310): 81.519,-57.601 83.658,-58.989 83.65,-64.95 77.15,-57.875
NetD37_C on Top Layer "NONET_L-01_P-001" (solid, remove dead copper, pour order 160): -89.918,-41.425 -92.909,-42.747 -93.575,-48.875 -84.65,-44.025
NetD58_C on Top Layer "NONET_L-01_P-001" (solid, remove dead copper, pour order 325): -97.112,-61.042 -99.284,-62.398 -104.8,-60.325 -96.075,-55.15
NetD56_C on Top Layer "NONET_L-01_P-001" (solid, remove dead copper, pour order 149): -67.278,-93.175 -69.218,-95.859 -66.375,-101.775 -60.975,-92.5
NetD53_C on Top Layer "NONET_L-01_P-001" (solid, remove dead copper, pour order 142): 83.048,-79.724 84.932,-81.423 84.525,-86.35 78.5,-79.375
VCC on Top Layer "NONET_L-01_P-001" (solid, remove dead copper, pour order 331): -136.907,-10.767 -134.273,-10.627 -134.1,-7.325 -137.075,-7.225
NetD24_C on Top Layer "NONET_L-01_P-001" (solid, remove dead copper, pour order 106): -85.512,-117.835 -87.422,-120.451 -95.525,-118.525 -86.975,-109.825
NetD30_C on Top Layer "NONET_L-01_P-001" (solid, remove dead copper, pour order 488): 133.317,-56.981 135.681,-57.936 138.2,-55.7 134.475,-53.325
VCC on Top Layer "NONET_L-01_P-001" (solid, remove dead copper, pour order 475): 161.075,-7.7 161.075,-3.88 137.875,-3.88 137.875,-7.499
NetD2_C on Top Layer "NONET_L-01_P-001" (solid, remove dead copper, pour order 68): -146.275,-75.275 -138.272,-89.124 -131.45,-85.05 -139.222,-71.674
NetD8_C on Top Layer "NONET_L-01_P-001" (solid, remove dead copper, pour order 92): 132.078,-83.853 140.85,-68.25 148,-71.675 138.804,-88.104
NetD5_C on Top Layer "NONET_L-01_P-001" (solid, remove dead copper, pour order 84): -8.375,-156.175 6.806,-156.44 6.806,-164.325 -8.175,-164.1
NetD17_C on Top Layer "NONET_L-01_P-001" (solid, remove dead copper, pour order 515): -78.039,-29.276 -74.851,-29.26 -74.856,-27.573 -78.033,-27.562
NetD17_C on Top Layer "NONET_L-01_P-001" (solid, remove dead copper, pour order 512): -81.058,-30.623 -79.099,-29.774 -72.745,-26.946 -82.693,-26.946
NetD38_C on Top Layer "NONET_L-01_P-001" (solid, remove dead copper, pour order 52): -42.752,-31.171 -49.175,-27.2 -51.8,-25.825 -51.8,-22.648 -40.225,-22.648 -40.225,-29.266
NetD30_C on Top Layer "NONET_L-01_P-001" (solid, remove dead copper, pour order 511): 140.993,-22.711 145.449,-22.711 145.449,-27.242 140.993,-27.242
NetD51_C on Top Layer "NONET_L-01_P-001" (solid, remove dead copper, pour order 62): 107.218,-46.953 122.457,-27 104.903,-27 104.438,-45.824
NetD9_C on Top Layer "NONET_L-01_P-001" (solid, remove dead copper, pour order 492): 77.825,-31.653 80.32,-32.567 82.246,-29.415 78.464,-28.114
NetD30_C on Top Layer "NONET_L-01_P-001" (solid, remove dead copper, pour order 490): 94.9,-27.365 94.9,-22.719 101.205,-22.719 97.909,-28.111
NetD9_C on Top Layer "NONET_L-01_P-001" (solid, remove dead copper, pour order 487): 158.621,-35.7 157.025,-36.2 154.525,-35.675 154.525,-32.325 158.625,-32.325
NetD9_C on Top Layer "NONET_L-01_P-001" (solid, remove dead copper, pour order 485): 149.506,-18.412 158.648,-18.412 158.621,-35.7 149.451,-35.649
NetD9_C on Top Layer "NONET_L-01_P-001" (solid, remove dead copper, pour order 484): 154.525,-35.675 157.025,-36.2 158.625,-32.9 154.725,-32.9
NetD31_C on Top Layer "NONET_L-01_P-001" (solid, remove dead copper, pour order 181): 94.919,-28.196 97.388,-28.809 99.775,-33.975 90.425,-30.725
GND on Top Layer "NONET_L-01_P-001" (solid, remove dead copper, pour order 326): 56.78,-30.82 57.075,-30.253 57.075,-15.556 65.55,-15.556 65.55,-16.175 65.321,-35.117
VCC on Top Layer "NONET_L-01_P-001" (solid, remove dead copper, pour order 482): 159.9,-3.874 168.533,-3.862 168.325,-7.7 159.9,-7.675
VCC on Top Layer "NONET_L-01_P-001" (solid, remove dead copper, pour order 476): 137.875,-7.5 134.4,-4.025 140.25,-4.025 140.275,-4
NetD85_C on Top Layer "NONET_L-01_P-001" (solid, remove dead copper, pour order 472): 146.584,-3.147 149.375,0 141.6,0.9 144.002,-3.056
VCC on Top Layer "NONET_L-01_P-001" (solid, remove dead copper, pour order 340): 165.1,-11.225 165.552,-3.888 168.527,-3.963 168.125,-11.35
NetD1_C on Top Layer "NONET_L-01_P-001" (solid, remove dead copper, pour order 338): -158.848,-12.935 -161.416,-13.111 -162.9,-16.85 -156.425,-16.15
VCC on Top Layer "NONET_L-01_P-001" (solid, remove dead copper, pour order 336): -161.625,-8.9 -161.625,7.5 -158.825,7.5 -158.825,-8.9
VCC on Top Layer "NONET_L-01_P-001" (solid, remove dead copper, pour order 335): -158.827,-12.125 -158.827,-8.676 -161.625,-8.676 -161.625,-12.325
NetD43_C on Top Layer "NONET_L-01_P-001" (solid, remove dead copper, pour order 329): -136.876,-11.56 -134.306,-11.433 -126.925,-20.525 -136.825,-23.675
GND on Top Layer "NONET_L-01_P-001" (solid, remove dead copper, pour order 327): 45.271,-21.878 32.272,-15.575 48.15,-15.575
NetD58_C on Top Layer "NONET_L-01_P-001" (solid, remove dead copper, pour order 153): -108.859,-32.616 -112.077,-33.522 -114.125,-39.325 -103.825,-37.075
GND on Top Layer "NONET_L-01_P-001" (solid, remove dead copper, pour order 321): 57.025,-30.575 65.351,-34.652 65.4,-26.496 59.6,-24.2
GND on Top Layer "NONET_L-01_P-001" (solid, remove dead copper, pour order 320): 37.551,-54.484 39.304,-56.673 52.828,-56.822 52.922,-47.974 37.823,-48.06
NetD41_C on Top Layer "NONET_L-01_P-001" (solid, remove dead copper, pour order 319): 56.048,-31.362 59.062,-32.809 56.5,-41.3 49.925,-33.35
NetD13_C on Top Layer "NONET_L-01_P-001" (solid, remove dead copper, pour order 318): 12.886,-83.083 13.406,-85.666 9.65,-89.475 9.125,-79.675
NetD12_C on Top Layer "NONET_L-01_P-001" (solid, remove dead copper, pour order 317): 13.589,-82.489 14.428,-86.677 21.475,-88.45 17.55,-77.6
NetD34_C on Top Layer "NONET_L-01_P-001" (solid, remove dead copper, pour order 316): 23.8,-97.972 24.454,-100.437 20.2,-103.85 19.8,-94.125
NetD33_C on Top Layer "NONET_L-01_P-001" (solid, remove dead copper, pour order 315): 24.43,-97.178 27.6,-91.85 33.725,-101.25 25.285,-100.472
NetD33_C on Top Layer "NONET_L-01_P-001" (solid, remove dead copper, pour order 314): 56.558,-83.021 52.075,-81.25 55.425,-90.525 58.049,-85.076
NetD32_C on Top Layer "NONET_L-01_P-001" (solid, remove dead copper, pour order 313): 56.92,-82.15 58.575,-74.5 65.575,-83.425 58.876,-84.844
NetD11_C on Top Layer "NONET_L-01_P-001" (solid, remove dead copper, pour order 312): 40.381,-73.288 42.175,-68.725 48.175,-76.075 42.059,-76.075
NetD12_C on Top Layer "NONET_L-01_P-001" (solid, remove dead copper, pour order 311): 39.88,-74.021 35.3,-72.325 38,-82.425 41.195,-76.205
NetD11_C on Top Layer "NONET_L-01_P-001" (solid, remove dead copper, pour order 309): 62.309,-56.459 64.273,-58.078 63.575,-63.925 57.275,-56.4
NetD10_C on Top Layer "NONET_L-01_P-001" (solid, remove dead copper, pour order 186): 62.469,-55.552 62.675,-48.425 71.725,-55.45 65.118,-57.729
NetD13_C on Top Layer "NONET_L-01_P-001" (solid, remove dead copper, pour order 185): -14.744,-82.352 -9.825,-79.275 -11.525,-88.625 -15.195,-85.577
NetD14_C on Top Layer "NONET_L-01_P-001" (solid, remove dead copper, pour order 184): -15.589,-82.628 -18,-78.3 -19.5,-86.75 -15.941,-85.147
NetD10_C on Top Layer "NONET_L-01_P-001" (solid, remove dead copper, pour order 183): 77.583,-32.418 73.175,-33.7 81.225,-38 79.974,-33.291
NetD31_C on Top Layer "NONET_L-01_P-001" (solid, remove dead copper, pour order 182): 81.623,-56.71 80.9,-50.475 90.925,-55.125 84.376,-58.503
NetD20_C on Top Layer "NONET_L-01_P-001" (solid, remove dead copper, pour order 180): 36.552,-54.541 38.684,-57.198 34.975,-63.225 30.575,-53.35
NetD20_C on Top Layer "NONET_L-01_P-001" (solid, remove dead copper, pour order 179): 1.629,-65.697 1.723,-68.261 5.525,-70.175 4.375,-61.575
NetD19_C on Top Layer "NONET_L-01_P-001" (solid, remove dead copper, pour order 178): 0.818,-65.235 0.915,-68.477 -5.425,-71.3 -4.075,-60.5
NetD41_C on Top Layer "NONET_L-01_P-001" (solid, remove dead copper, pour order 177): 16.212,-46.938 17.248,-49.265 21.6,-50.8 19.15,-42.25
NetD14_C on Top Layer "NONET_L-01_P-001" (solid, remove dead copper, pour order 176): -41.371,-72.691 -42.908,-75.638 -40.075,-80.625 -35.9,-71.525
NetD19_C on Top Layer "NONET_L-01_P-001" (solid, remove dead copper, pour order 175): -35.677,-54.396 -31.075,-53.275 -35,-61.425 -37.1,-56.504
NetD40_C on Top Layer "NONET_L-01_P-001" (solid, remove dead copper, pour order 174): 15.183,-46.605 16.58,-49.739 11.975,-53.975 10.275,-43.6
NetD40_C on Top Layer "NONET_L-01_P-001" (solid, remove dead copper, pour order 173): -14.107,-47.757 -11.15,-44.8 -11.825,-53.5 -14.807,-50.22
NetD34_C on Top Layer "NONET_L-01_P-001" (solid, remove dead copper, pour order 172): -11.211,-99.712 -11.563,-103.007 -6.225,-105.55 -6.75,-95.85
NetD35_C on Top Layer "NONET_L-01_P-001" (solid, remove dead copper, pour order 171): -12.061,-100.147 -12.324,-102.677 -17.425,-104.425 -14.325,-95.4
NetD35_C on Top Layer "NONET_L-01_P-001" (solid, remove dead copper, pour order 170): -45.401,-89.122 -46.98,-92.214 -43.325,-96.55 -40.15,-87
NetD39_C on Top Layer "NONET_L-01_P-001" (solid, remove dead copper, pour order 169): -14.73,-46.977 -15.675,-50.267 -21.65,-50.725 -17.3,-41.35
NetD36_C on Top Layer "NONET_L-01_P-001" (solid, remove dead copper, pour order 168): -46.386,-89.278 -47.542,-91.547 -54.175,-91.55 -47.15,-83.825
NetD15_C on Top Layer "NONET_L-01_P-001" (solid, remove dead copper, pour order 167): -42.275,-72.678 -43.449,-74.937 -48.475,-75.55 -43.175,-67.675
NetD18_C on Top Layer "NONET_L-01_P-001" (solid, remove dead copper, pour order 166): -36.093,-53.58 -37.965,-56.342 -45.4,-55.575 -37.7,-47.4
NetD15_C on Top Layer "NONET_L-01_P-001" (solid, remove dead copper, pour order 165): -63.245,-54.689 -58.4,-55.375 -64.775,-62.075 -65.695,-56.98
NetD16_C on Top Layer "NONET_L-01_P-001" (solid, remove dead copper, pour order 163): -64.121,-54.394 -65.975,-56.133 -71.75,-54.8 -63.225,-49.3
NetD36_C on Top Layer "NONET_L-01_P-001" (solid, remove dead copper, pour order 162): -73.481,-67.132 -75.971,-69.367 -74.225,-75.525 -67.5,-67.625
NetD37_C on Top Layer "NONET_L-01_P-001" (solid, remove dead copper, pour order 161): -74.412,-66.877 -76.312,-68.575 -82.05,-67.175 -73.425,-62.225
NetD38_C on Top Layer "NONET_L-01_P-001" (solid, remove dead copper, pour order 158): -90.637,-40.853 -90.637,-22.645 -97.965,-22.645 -97.899,-44.14
NetD18_C on Top Layer "NONET_L-01_P-001" (solid, remove dead copper, pour order 157): -55.486,-33.863 -50.275,-34.725 -58.047,-39.865 -57.615,-35.111
NetD39_C on Top Layer "NONET_L-01_P-001" (solid, remove dead copper, pour order 155): -40.051,-30.147 -35.275,-29.825 -40.95,-36.175 -42.085,-31.681
NetD59_C on Top Layer "NONET_L-01_P-001" (solid, remove dead copper, pour order 154): -109.495,-31.949 -112.028,-32.687 -112.9,-29.2 -109,-29.025
NetD57_C on Top Layer "NONET_L-01_P-001" (solid, remove dead copper, pour order 151): -99.115,-63.239 -96.369,-61.511 -90.3,-63.625 -99.275,-69.375
NetD57_C on Top Layer "NONET_L-01_P-001" (solid, remove dead copper, pour order 150): -68.198,-93.071 -69.697,-95.135 -74.125,-95.15 -68.3,-87.975
NetD56_C on Top Layer "NONET_L-01_P-001" (solid, remove dead copper, pour order 148): -30.946,-111.586 -31.598,-114.043 -36.8,-115.625 -32.7,-106.725
NetD55_C on Top Layer "NONET_L-01_P-001" (solid, remove dead copper, pour order 147): -30.05,-111.323 -30.893,-114.499 -26.325,-118.45 -25.575,-108.8
NetD55_C on Top Layer "NONET_L-01_P-001" (solid, remove dead copper, pour order 146): 10.122,-115.446 10.387,-117.977 6.6,-120.7 7.15,-111.8
NetD54_C on Top Layer "NONET_L-01_P-001" (solid, remove dead copper, pour order 145): 10.854,-114.814 14.3,-110.1 16.8,-120.45 11.215,-118.161
NetD54_C on Top Layer "NONET_L-01_P-001" (solid, remove dead copper, pour order 144): 48.373,-105.057 44.775,-102.8 47.475,-110.65 49.487,-107.348
NetD53_C on Top Layer "NONET_L-01_P-001" (solid, remove dead copper, pour order 143): 48.902,-104.322 50.362,-107.305 57.75,-107.375 51.15,-98.6
NetD52_C on Top Layer "NONET_L-01_P-001" (solid, remove dead copper, pour order 141): 83.296,-78.877 83.775,-72.1 91.725,-79.225 85.747,-81.073
NetD49_C on Top Layer "NONET_L-01_P-001" (solid, remove dead copper, pour order 140): 107.177,-73.644 100.225,-76.025 109.625,-81.825 109.947,-75.436
NetD52_C on Top Layer "NONET_L-01_P-001" (solid, remove dead copper, pour order 139): 104.423,-46.691 99.475,-48.9 108.425,-52.7 106.781,-47.644
NetD61_C on Top Layer "NONET_L-01_P-001" (solid, remove dead copper, pour order 138): 17.252,-27.947 11.5,-26.25 15.45,-36.4 19.178,-30.703
NetD61_C on Top Layer "NONET_L-01_P-001" (solid, remove dead copper, pour order 137): 0.923,-33.519 3.4,-29.425 5.425,-38.525 0.879,-36.065
NetD60_C on Top Layer "NONET_L-01_P-001" (solid, remove dead copper, pour order 136): 0.123,-32.966 -3.25,-29.375 -6.75,-39.275 0.058,-36.278
NetD60_C on Top Layer "NONET_L-01_P-001" (solid, remove dead copper, pour order 135): -16.031,-27.969 -17.527,-30.028 -15.975,-34.55 -11.625,-26.5
NetD51_C on Top Layer "NONET_L-01_P-001" (solid, remove dead copper, pour order 134): 128.65,-30.175 129.225,-27 125.892,-27 125.651,-29.545
NetD51_C on Top Layer "NONET_L-01_P-001" (solid, remove dead copper, pour order 60): 119.475,-27 129.225,-27 125.651,-29.545 119.475,-29.825
NetD29_C on Top Layer "NONET_L-01_P-001" (solid, remove dead copper, pour order 132): 106.675,-99.277 108.561,-100.984 114.575,-99.1 106.875,-93.85
NetD29_C on Top Layer "NONET_L-01_P-001" (solid, remove dead copper, pour order 131): 132.733,-57.619 135.605,-58.764 136.075,-66 127.204,-61.247
NetD50_C on Top Layer "NONET_L-01_P-001" (solid, remove dead copper, pour order 130): 107.944,-73.185 110.082,-74.574 116.125,-72.625 107.253,-67.292
NetD50_C on Top Layer "NONET_L-01_P-001" (solid, remove dead copper, pour order 128): 125.606,-30.657 128.787,-31.325 131.575,-37.175 120.6,-35.525
NetD28_C on Top Layer "NONET_L-01_P-001" (solid, remove dead copper, pour order 127): 105.711,-99.514 108.249,-101.804 105.65,-109.6 98.325,-100.5
NetD28_C on Top Layer "NONET_L-01_P-001" (solid, remove dead copper, pour order 126): 62.685,-132.155 64.475,-125.925 70.975,-134.675 63.802,-134.448
NetD49_C on Top Layer "NONET_L-01_P-001" (solid, remove dead copper, pour order 125): 75.48,-107.153 76.967,-109.206 83.15,-109.15 76.075,-101.55
NetD48_C on Top Layer "NONET_L-01_P-001" (solid, remove dead copper, pour order 124): 74.571,-107.283 76.478,-109.89 73.05,-116.7 67.9,-106.6
NetD27_C on Top Layer "NONET_L-01_P-001" (solid, remove dead copper, pour order 123): 61.764,-132.07 55.425,-129.85 59.25,-139.675 63.179,-134.995
NetD27_C on Top Layer "NONET_L-01_P-001" (solid, remove dead copper, pour order 122): 14.439,-145.8 14.703,-148.331 20.375,-150.725 17.4,-141.075
NetD26_C on Top Layer "NONET_L-01_P-001" (solid, remove dead copper, pour order 121): 13.578,-145.371 13.936,-148.624 8.575,-151.625 8.925,-141.475
NetD26_C on Top Layer "NONET_L-01_P-001" (solid, remove dead copper, pour order 120): -37.881,-141.452 -38.533,-143.913 -35.35,-146.975 -33.725,-138.125
NetD25_C on Top Layer "NONET_L-01_P-001" (solid, remove dead copper, pour order 119): -38.486,-140.628 -39.345,-143.896 -44.875,-144.65 -40.7,-135.525
NetD25_C on Top Layer "NONET_L-01_P-001" (solid, remove dead copper, pour order 118): -84.822,-118.236 -86.627,-120.727 -83.675,-126.75 -79,-116.85
NetD48_C on Top Layer "NONET_L-01_P-001" (solid, remove dead copper, pour order 117): 32.87,-127.264 33.527,-129.726 38.275,-130.975 35.675,-121.95
NetD47_C on Top Layer "NONET_L-01_P-001" (solid, remove dead copper, pour order 116): 31.98,-127.054 32.816,-130.173 27.375,-134.85 26.175,-124.05
NetD47_C on Top Layer "NONET_L-01_P-001" (solid, remove dead copper, pour order 115): -14.004,-130.616 -14.29,-133.299 -9.275,-137.55 -9.275,-126.2
NetD46_C on Top Layer "NONET_L-01_P-001" (solid, remove dead copper, pour order 114): -14.769,-130.199 -15.118,-133.467 -21.625,-135.875 -19.225,-125.175
NetD45_C on Top Layer "NONET_L-01_P-001" (solid, remove dead copper, pour order 113): -59.609,-116.33 -61.45,-110.225 -67.85,-118.525 -61.109,-119.266
NetD46_C on Top Layer "NONET_L-01_P-001" (solid, remove dead copper, pour order 112): -59.132,-117.177 -60.292,-119.452 -57.675,-124.375 -53.525,-114.975
NetD45_C on Top Layer "NONET_L-01_P-001" (solid, remove dead copper, pour order 111): -95.494,-87.77 -97.386,-89.472 -97.125,-94.075 -90.75,-88.075
NetD43_C on Top Layer "NONET_L-01_P-001" (solid, remove dead copper, pour order 110): -120.208,-54.558 -117.238,-53.245 -116.275,-45.875 -127.15,-50.925
NetD44_C on Top Layer "NONET_L-01_P-001" (solid, remove dead copper, pour order 108): -95.696,-86.871 -98.109,-89.048 -104.4,-86.55 -95.45,-80.375
NetD44_C on Top Layer "NONET_L-01_P-001" (solid, remove dead copper, pour order 107): -119.491,-55.126 -117.161,-54.093 -112.4,-55.625 -120.575,-60.1
NetD24_C on Top Layer "NONET_L-01_P-001" (solid, remove dead copper, pour order 104): -124.056,-79.151 -124.75,-85.075 -115.65,-79.475 -121.895,-77.804
NetD23_C on Top Layer "NONET_L-01_P-001" (solid, remove dead copper, pour order 103): -121.967,-76.91 -121.075,-71.175 -130.525,-75.9 -124.79,-78.665
NetD23_C on Top Layer "NONET_L-01_P-001" (solid, remove dead copper, pour order 102): -141.059,-42.371 -142.65,-47.025 -133.875,-43.825 -138.61,-41.671
NetD22_C on Top Layer "NONET_L-01_P-001" (solid, remove dead copper, pour order 101): -138.531,-40.805 -136.65,-34.45 -145.7,-36.4 -141.491,-41.65
NetD7_C on Top Layer "NONET_L-01_P-001" (solid, remove dead copper, pour order 80): 131.559,-89.631 126.775,-92.375 132.325,-96.7 134.021,-91.224
NetD8_C on Top Layer "NONET_L-01_P-001" (solid, remove dead copper, pour order 95): 132.19,-89.085 132.078,-83.853 138.804,-88.104 134.327,-90.474
NetD8_C on Top Layer "NONET_L-01_P-001" (solid, remove dead copper, pour order 94): 132.525,-83.1 132.375,-88.825 134.5,-90.225 139.2,-87.3
NetD8_C on Top Layer "NONET_L-01_P-001" (solid, remove dead copper, pour order 93): 154.102,-36.709 150.975,-41.4 158.325,-42.45 157.004,-37.301
NetD5_C on Top Layer "NONET_L-01_P-001" (solid, remove dead copper, pour order 90): 39.432,-155.186 34.175,-152.975 35.55,-160.425 40.23,-158.187
NetD5_C on Top Layer "NONET_L-01_P-001" (solid, remove dead copper, pour order 89): -17.118,-159.597 -12.55,-156.275 -12.575,-163.6 -17.385,-162.129
NetD4_C on Top Layer "NONET_L-01_P-001" (solid, remove dead copper, pour order 88): -17.887,-159.235 -22.725,-154.925 -23.875,-162.45 -18.189,-162.126
NetD4_C on Top Layer "NONET_L-01_P-001" (solid, remove dead copper, pour order 87): -72.283,-143.027 -67.875,-141.95 -70.375,-147.95 -73.441,-145.301
NetD3_C on Top Layer "NONET_L-01_P-001" (solid, remove dead copper, pour order 86): -72.876,-142.443 -76.325,-136.925 -80.4,-143.35 -74.231,-145.066
NetD3_C on Top Layer "NONET_L-01_P-001" (solid, remove dead copper, pour order 85): -117.838,-107.762 -113,-109.15 -117.825,-114.075 -119.732,-109.477
NetD6_C on Top Layer "NONET_L-01_P-001" (solid, remove dead copper, pour order 83): 91.539,-130.926 86.175,-131.15 90.025,-137.2 93.311,-133.347
NetD6_C on Top Layer "NONET_L-01_P-001" (solid, remove dead copper, pour order 82): 40.292,-155.311 42.5,-151.45 45.95,-157.875 40.954,-157.775
NetD7_C on Top Layer "NONET_L-01_P-001" (solid, remove dead copper, pour order 81): 92.375,-130.7 93.425,-125.975 97.775,-131.45 93.867,-132.76
NetD62_C on Top Layer "NONET_L-01_P-001" (solid, remove dead copper, pour order 78): 42.579,-21.528 37.575,-31.775 45.1,-31.75 45.1,-22.706
NetD62_C on Top Layer "NONET_L-01_P-001" (solid, remove dead copper, pour order 77): 18.254,-27.981 23.65,-24.138 23.65,-31.3 19.458,-29.703
GND on Top Layer "NONET_L-01_P-001" (solid, remove dead copper, pour order 6): 46.768,-18.658 44.412,-17.559 42.923,-20.751 45.28,-21.85
NetD1_C on Top Layer "NONET_L-01_P-001" (solid, remove dead copper, pour order 72): -148.339,-66.971 -151.975,-62.575 -144.775,-60.3 -145.473,-65.7
NetD2_C on Top Layer "NONET_L-01_P-001" (solid, remove dead copper, pour order 70): -120.439,-109.006 -125.675,-105.975 -119.5,-101.45 -118.138,-106.967
NetD2_C on Top Layer "NONET_L-01_P-001" (solid, remove dead copper, pour order 69): -147.866,-67.651 -147.575,-71.95 -141.2,-68.5 -145.537,-66.615
NetD59_C on Top Layer "NONET_L-01_P-001" (solid, remove dead copper, pour order 50): -18.05,-29.397 -30.6,-21.775 -30.6,-18.35 -16.3,-18.35 -16.3,-26.964
NetD80_C on Top Layer "NONET_L-01_P-001" (solid, remove dead copper, pour order 522): 55.392,32.881 58.735,28.417 60.989,31.801 58.196,34.503
GND on Top Layer "NONET_L-01_P-001" (solid, remove dead copper, pour order 471): -45.436,21.998 -32.113,15.566 -48.198,15.566
NetD77_C on Top Layer "NONET_L-01_P-001" (solid, remove dead copper, pour order 505): 15.949,82.748 18.36,78.424 19.86,86.874 16.307,85.273
NetD97_C on Top Layer "NONET_L-01_P-001" (solid, remove dead copper, pour order 463): -23.796,97.977 -24.457,100.439 -20.2,103.85 -19.8,94.125
NetD121_C on Top Layer "NONET_L-01_P-001" (solid, remove dead copper, pour order 469): 97.119,61.046 99.279,62.396 104.8,60.325 96.075,55.15
VCC on Top Layer "NONET_L-01_P-001" (solid, remove dead copper, pour order 474): 136.9,10.765 134.275,10.628 134.1,7.325 137.075,7.225
NetD106_C on Top Layer "NONET_L-01_P-001" (solid, remove dead copper, pour order 473): 136.88,11.571 134.31,11.433 126.925,20.525 136.825,23.675
NetD64_C on Top Layer "NONET_L-01_P-001" (solid, remove dead copper, pour order 356): 148.335,66.976 151.975,62.575 144.775,60.3 145.473,65.706
NetD69_C on Top Layer "NONET_L-01_P-001" (solid, remove dead copper, pour order 363): -91.54,130.926 -86.175,131.15 -90.025,137.2 -93.312,133.347
NetD71_C on Top Layer "NONET_L-01_P-001" (solid, remove dead copper, pour order 371): -132.753,82.652 -140.85,68.25 -148,71.675 -139.477,86.902
NetD71_C on Top Layer "NONET_L-01_P-001" (solid, remove dead copper, pour order 373): -132.753,82.652 -132.196,89.081 -134.33,90.473 -139.477,86.902
NetD65_C on Top Layer "NONET_L-01_P-001" (solid, remove dead copper, pour order 353): 146.275,75.275 138.272,89.124 131.075,85.475 139.425,71.1
NetD68_C on Top Layer "NONET_L-01_P-001" (solid, remove dead copper, pour order 364): 8.728,156.141 -6.456,156.406 -6.456,164.363 8.526,164.138
NetD80_C on Top Layer "NONET_L-01_P-001" (solid, remove dead copper, pour order 521): 78.039,29.298 72.111,29.268 72.117,27.169 78.032,27.148
NetD80_C on Top Layer "NONET_L-01_P-001" (solid, remove dead copper, pour order 520): 80.934,30.901 72.05,26.946 82.693,26.946
NetD101_C on Top Layer "NONET_L-01_P-001" (solid, remove dead copper, pour order 519): 42.66,31.108 45.765,28.49 42.791,25.907 40.508,29.488
NetD101_C on Top Layer "NONET_L-01_P-001" (solid, remove dead copper, pour order 517): 90.593,40.842 90.767,40.009 90.979,36.203 94.934,36.203 94.934,42.77
NetD122_C on Top Layer "NONET_L-01_P-001" (solid, remove dead copper, pour order 342): 18.17,29.56 30.6,21.775 30.6,18.374 16.3,18.374 16.3,26.974
NetD75_C on Top Layer "NONET_L-01_P-001" (solid, remove dead copper, pour order 510): -13.89,85.873 -13.242,82.633 -16.45,78.65 -18.65,87.75
NetD75_C on Top Layer "NONET_L-01_P-001" (solid, remove dead copper, pour order 507): -39.906,74.015 -34.94,72.449 -37.64,82.549 -41.183,76.187
NetD76_C on Top Layer "NONET_L-01_P-001" (solid, remove dead copper, pour order 509): -12.528,83.201 -13.041,85.795 -9.29,89.599 -8.765,79.799
NetD76_C on Top Layer "NONET_L-01_P-001" (solid, remove dead copper, pour order 506): 15.095,82.471 10.185,79.399 11.885,88.749 15.548,85.707
NetD77_C on Top Layer "NONET_L-01_P-001" (solid, remove dead copper, pour order 504): 41.724,72.814 43.265,75.768 40.435,80.749 36.26,71.649
NetD74_C on Top Layer "NONET_L-01_P-001" (solid, remove dead copper, pour order 503): -40.391,73.261 -42.175,68.725 -48.175,76.075 -42.052,76.075
NetD74_C on Top Layer "NONET_L-01_P-001" (solid, remove dead copper, pour order 502): -62.307,56.455 -64.273,58.078 -63.575,63.925 -57.275,56.4
NetD95_C on Top Layer "NONET_L-01_P-001" (solid, remove dead copper, pour order 501): -58.833,84.793 -56.906,82.141 -58.225,75.525 -66.15,83.325
NetD96_C on Top Layer "NONET_L-01_P-001" (solid, remove dead copper, pour order 500): -58.05,85.077 -56.553,83.015 -51.9,81.45 -55.35,90.25